# Altium PCB Preamp.PcbDoc
Units mil, origin at the board's own origin, x right, y up, seen from the top; angles counter-clockwise.
Board outline 1250 x 480 mil, 4 copper layers (Top Layer, Ground Plane, Power Plane, Bottom Layer), stack 25.9 mil thick; 15 components, 14 nets, 56 pads, 61 vias.
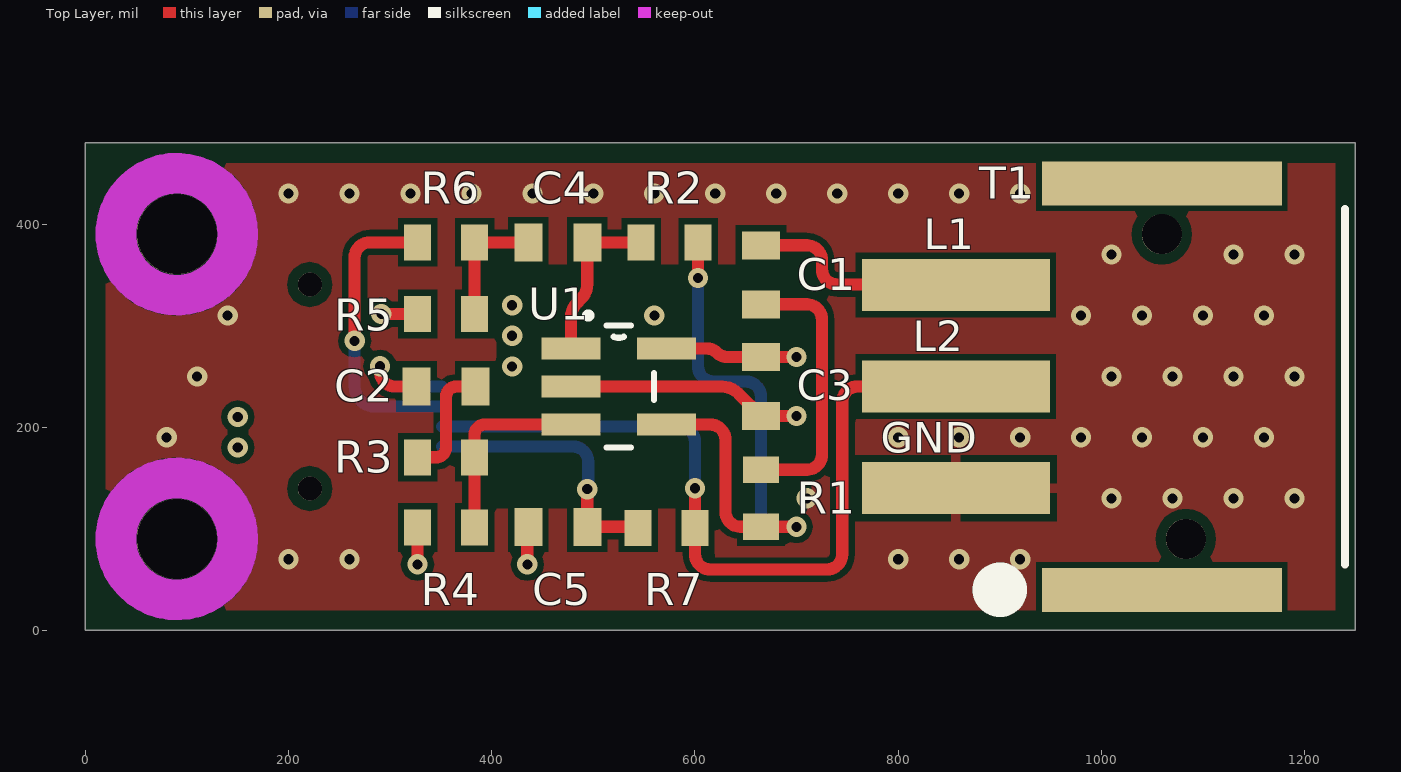
[diagram p0: Top Layer view]
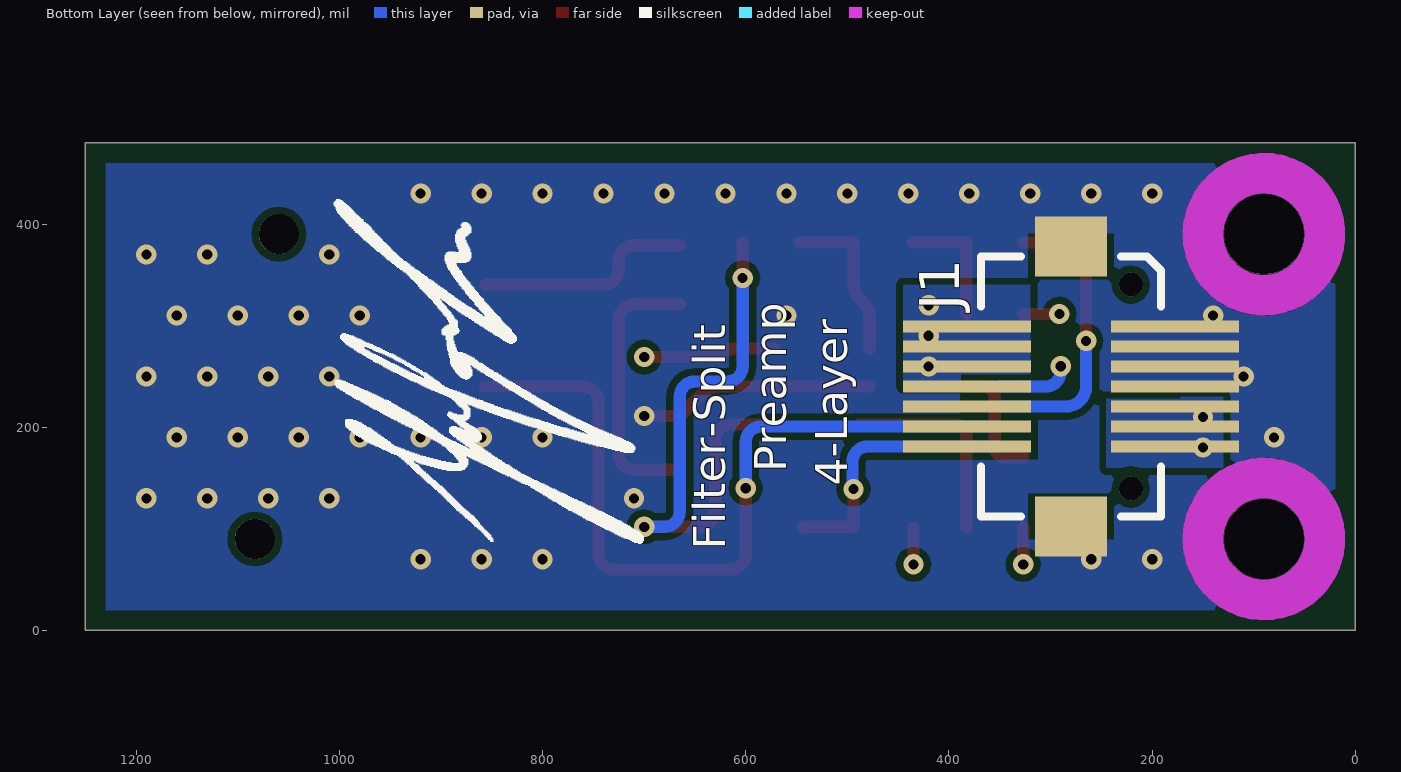
[diagram p1: Bottom Layer view, seen from below]
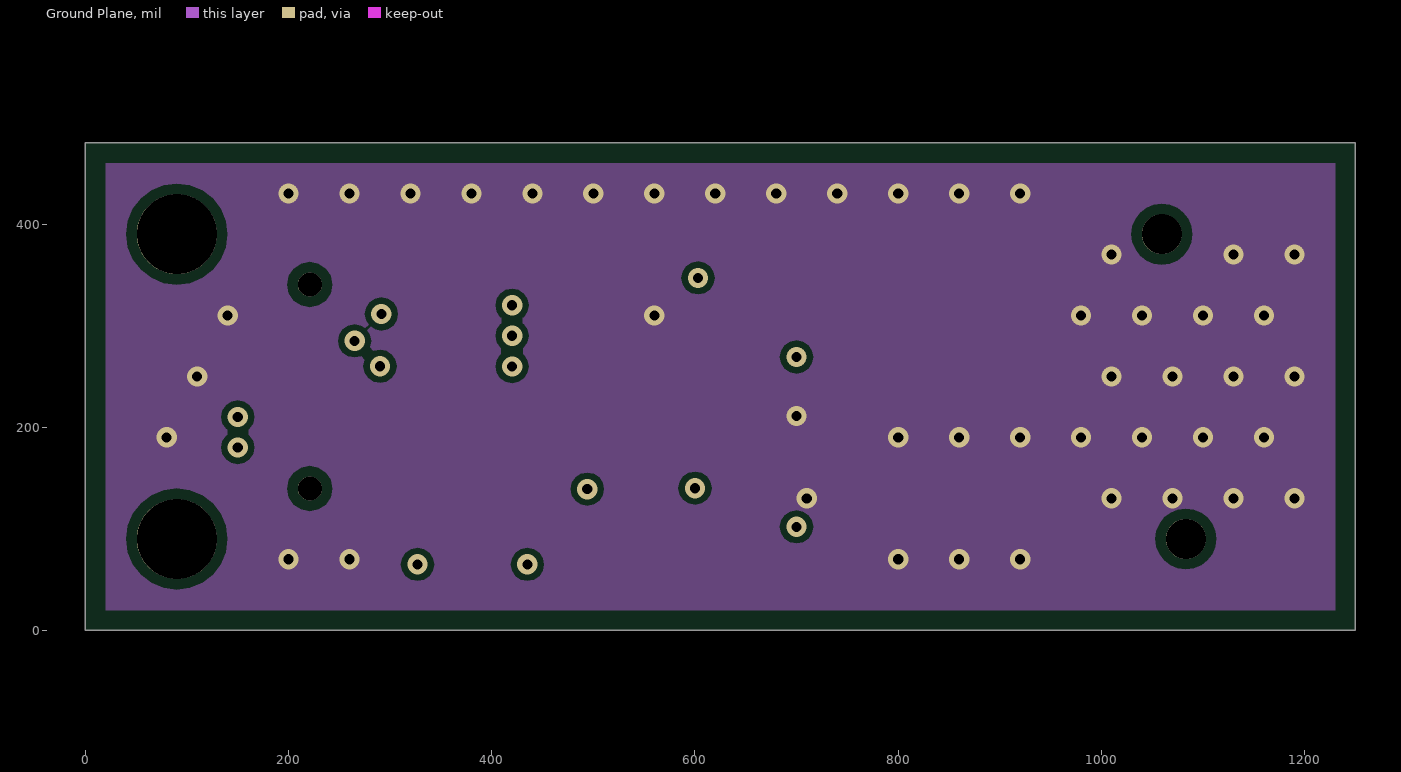
[diagram p2: Ground Plane]
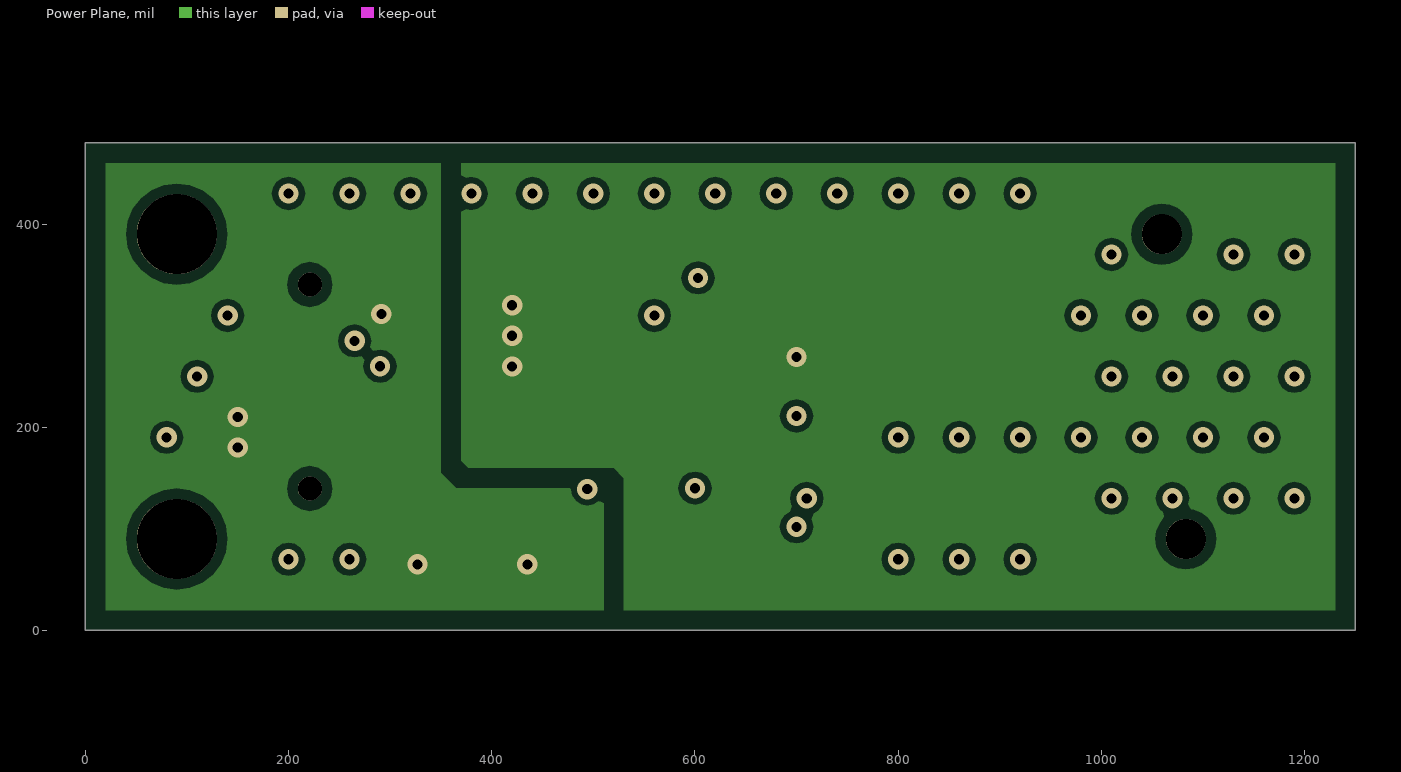
[diagram p3: Power Plane]
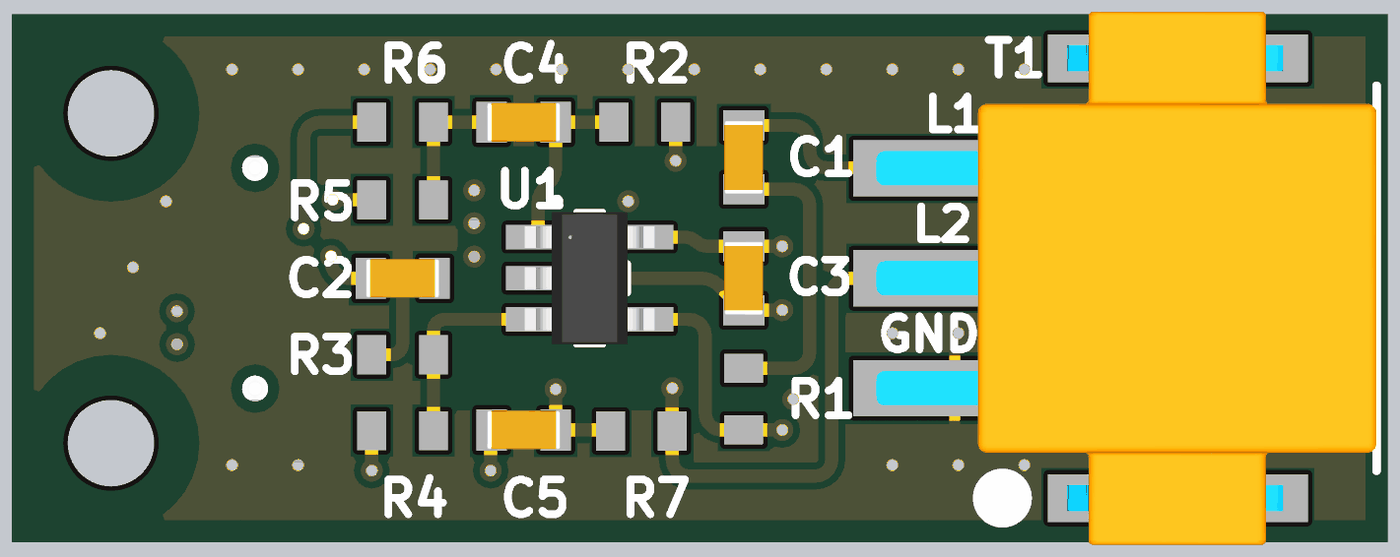
[diagram p4: 3D render of the assembled board from above, using the file's embedded part models]

## Layer stack, top to bottom
Top Solder: solder mask 1, Solder Resist, Dk 3.5
Top Layer: signal copper 1.4
Dielectric 1: core 6.7, FR-4, Dk 4.2
Ground Plane: signal copper 0.7
Dielectric 3: prepreg 5, Dk 4.2
Power Plane: signal copper 0.7
Dielectric 2: core 10, Dk 4.2
Bottom Layer: signal copper 1.4
Bottom Solder: solder mask 1, Solder Resist, Dk 3.5

## Board outline
0,0 1250,0 1250,480 0,480

## Design rules (kind name [scope] priority, off if disabled: settings)
Clearance Clearance_4 [(ObjectKind = 'Arc') And (Keepout = 'True')] p1: gap=6 ignorepadtopadclearanceinfootprint=FALSE except(0: Arc-Arc Arc-Track Arc-SMDPad Arc-THPad Arc-Via Arc-Fill Arc-Poly Arc-Region Arc-Text Arc-Hole Track-Hole SMDPad-Hole THPad-Hole Via-Hole Fill-Hole Poly-Hole Region-Hole Text-Hole; 5: SMDPad-SMDPad; 7: THPad-Via Via-Via; 10: SMDPad-Text THPad-THPad THPad-Fill THPad-Poly THPad-Region THPad-Text Via-Text Fill-Text Poly-Text Region-Text Text-Text)
Clearance Clearance_3 [InNamedPolygon('BOTTOM_GND')] p2: gap=7 ignorepadtopadclearanceinfootprint=FALSE except(0: Arc-Hole Track-Hole SMDPad-Hole THPad-Hole Via-Hole Fill-Hole Poly-Hole Region-Hole Text-Hole)
Clearance Clearance_2 [InNamedPolygon('BOTTOM_V+')] p3: gap=7 ignorepadtopadclearanceinfootprint=FALSE except(0: Arc-Hole Track-Hole SMDPad-Hole THPad-Hole Via-Hole Fill-Hole Poly-Hole Region-Hole Text-Hole)
Clearance Clearance_1 [InNamedPolygon('TOP_VREF')] p4: gap=10 ignorepadtopadclearanceinfootprint=FALSE except(0: Arc-Hole Track-Hole SMDPad-Hole THPad-Hole Via-Hole Fill-Hole Poly-Hole Region-Hole Text-Hole; 7: Arc-Fill Arc-Poly Arc-Region Track-Fill Track-Poly Track-Region SMDPad-Fill SMDPad-Poly SMDPad-Region THPad-Fill THPad-Poly THPad-Region Via-Fill Via-Poly Via-Region Fill-Fill Fill-Poly Fill-Region Poly-Poly Poly-Region Region-Region)
Clearance [All] p5: gap=6 ignorepadtopadclearanceinfootprint=FALSE except(0: Arc-Hole Track-Hole SMDPad-Hole THPad-Hole Via-Hole Fill-Hole Poly-Hole Region-Hole Text-Hole; 5: SMDPad-SMDPad; 7: THPad-Via Via-Via; 10: SMDPad-Text THPad-THPad THPad-Fill THPad-Poly THPad-Region THPad-Text Via-Text Fill-Text Poly-Text Region-Text Text-Text)
PlaneClearance [All] p1: clearance=10
PlaneConnect [All] p1: pad.planeconnectstyle=Relief pad.reliefexpansion=20 pad.reliefentries=4 pad.reliefconductorwidth=10 pad.reliefairgap=10 via.planeconnectstyle=Direct via.reliefexpansion=20 via.reliefentries=4 via.reliefconductorwidth=10 via.reliefairgap=10
PolygonConnect PolygonConnect_5 [All vs IsNamedPolygon('BOTTOM_GND')] p1: thpad.connectstyle=Relief thpad.reliefconductorwidth=10 thpad.reliefentries=4 thpad.polygonreliefangle="90 Angle" thpad.airgapwidth=10 smdpad.connectstyle=Direct smdpad.reliefconductorwidth=10 smdpad.reliefentries=4 smdpad.polygonreliefangle="90 Angle" smdpad.airgapwidth=10 via.connectstyle=Direct via.reliefconductorwidth=10 via.reliefentries=4 via.polygonreliefangle="90 Angle" via.airgapwidth=10
PolygonConnect PolygonConnect_4 [All vs IsNamedPolygon('BOTTOM_GND')] p2: thpad.connectstyle=Relief thpad.reliefconductorwidth=10 thpad.reliefentries=4 thpad.polygonreliefangle="90 Angle" thpad.airgapwidth=10 smdpad.connectstyle=Relief smdpad.reliefconductorwidth=10 smdpad.reliefentries=4 smdpad.polygonreliefangle="90 Angle" smdpad.airgapwidth=7 via.connectstyle=Direct via.reliefconductorwidth=10 via.reliefentries=4 via.polygonreliefangle="90 Angle" via.airgapwidth=10
PolygonConnect PolygonConnect_3 [All vs IsNamedPolygon('TOP_GND')] p3: thpad.connectstyle=Relief thpad.reliefconductorwidth=10 thpad.reliefentries=4 thpad.polygonreliefangle="90 Angle" thpad.airgapwidth=10 smdpad.connectstyle=Relief smdpad.reliefconductorwidth=10 smdpad.reliefentries=4 smdpad.polygonreliefangle="90 Angle" smdpad.airgapwidth=7 via.connectstyle=Direct via.reliefconductorwidth=10 via.reliefentries=4 via.polygonreliefangle="90 Angle" via.airgapwidth=10
PolygonConnect PolygonConnect_2 [All vs IsNamedPolygon('TOP_VREF')] p4: thpad.connectstyle=Relief thpad.reliefconductorwidth=10 thpad.reliefentries=4 thpad.polygonreliefangle="90 Angle" thpad.airgapwidth=10 smdpad.connectstyle=Relief smdpad.reliefconductorwidth=10 smdpad.reliefentries=4 smdpad.polygonreliefangle="90 Angle" smdpad.airgapwidth=7 via.connectstyle=Direct via.reliefconductorwidth=10 via.reliefentries=4 via.polygonreliefangle="90 Angle" via.airgapwidth=10
PolygonConnect PolygonConnect_1 [All vs IsNamedPolygon('BOTTOM_VREF')] p5: thpad.connectstyle=Relief thpad.reliefconductorwidth=10 thpad.reliefentries=4 thpad.polygonreliefangle="90 Angle" thpad.airgapwidth=10 smdpad.connectstyle=Direct smdpad.reliefconductorwidth=10 smdpad.reliefentries=4 smdpad.polygonreliefangle="90 Angle" smdpad.airgapwidth=10 via.connectstyle=Direct via.reliefconductorwidth=10 via.reliefentries=4 via.polygonreliefangle="90 Angle" via.airgapwidth=10
PolygonConnect [All] p6: connectstyle=Direct reliefconductorwidth=20 reliefentries=4 polygonreliefangle="90 Angle" airgapwidth=10
RoutingVias [All] p1: holewidth=10 width=20 viastyle="Through Hole" minholewidth=10 minwidth=20 maxholewidth=28 maxwidth=50
SolderMaskExpansion [All] p1: expansion=4
Width [All] p1: maxlimit=50 minlimit=7 preferedwidth=20 toplayer_prefwidth=10 midlayer1_minwidth=10 midlayer2_minwidth=10 bottomlayer_prefwidth=10 minimp=50.000000 maximp=50.000000 favimp=50.000000
28 further rules are at their usual default settings.

## Components (designator, comment, footprint, x,y, rotation, side; value= is the part's Value field where it differs from the comment)
C1 "2200pF" CAPC1608X09N 665,350 r270 top
C2 "2200pF" CAPC1608X09N 355,240 r0 top
C3 "10nF" CAPC1608X09N 665,240 r90 top
C4 "1uF" CAPC1608X09N 465,381.95 r180 top
C5 "0.018uF" CAPC1608X09N 465,101.95 r0 top
J1 "CONN RECEPT 14POS" DF12(3.0)-14DS 280,240 r270 bottom
R1 "30K" RESC1608X06N 665,130 r270 top
R2 "150K" RESC1608X06N 575,381.95 r180 top
R3 "30K" RESC1608X06N 355,170.39 r0 top
R4 "150K" RESC1608X06N 355,101.36 r180 top
R5 "47K" RESC1608X06N 355,311.36 r0 top
R6 "10K" RESC1608X06N 355,381.95 r0 top value=10k
R7 "20K" RESC1608X06N 572,100.98 r180 top
T1 "TERM BLK HOR 3POS" "TERM BLK HOR 3POS" 1030,240 r270 top
U1 "OPA191" SOT23-5 525,240 r0 top

## Footprints (in the part's own frame and the unit in brackets; to place one, negate y for a bottom-side part, rotate by r counter-clockwise, add the part's x,y. Pads: shape width x height; smd on the part's side, far side on the other; paste and mask are expansions set on the pad)
CAPC1608X09N [mm] "Chip Capacitor, 2-Leads, Body 1.60x0.80mm, IPC Medium Density"
  rect 0.7x0.95 smd: 1(-0.737,0) 2(0.738,0)
  body extent -0.85,-0.45 0.85,0.45, height 0.8
DF12(3.0)-14DS [mm] "CONN RECEPT 14POS 3MM SMD 0.5MM"
  rect 0.3x3.2 smd mask+0.051: 1(-1.5,2.6) 2(-1,2.6) 3(-0.5,2.6) 4(0,2.6) 5(0.5,2.6) 6(1,2.6) 7(1.5,2.6) 8(1.5,-2.6) 9(1,-2.6) 10(0.5,-2.6) 11(0,-2.6) 12(-0.5,-2.6) 13(-1,-2.6) 14(-1.5,-2.6)
  rect 1.5x1.8 smd mask+0.102: ""(-3.5,0)
  round 0.6 hole 0.6 unplated mask+0: ""(-2.55,1.5) ""(2.55,1.5)
  rect 1.5x1.8 smd: ""(3.5,0)
  Multi-Layer region: -4,1
  silkscreen extent -3.25,-2.25 3.25,2.25, body extent -3.3,-2.3 3.3,2.3, height 2.19
RESC1608X06N [mm] "Chip Resistor, 2-Leads, Body 1.60x0.80mm, IPC Medium Density"
  rect 0.67x0.9 smd: 1(-0.713,0) 2(0.713,0)
  body extent -0.85,-0.45 0.85,0.45, height 0.55
SOT23-5 [mil]
  rect 58x22 smd: 1(-47,37.4) 2(-47,0) 3(-47,-37.4) 4(47,-37.4) 5(47,37.4)
  silkscreen extent -31,-60 34,71, body extent -59,-60 59,60, height 57
"TERM BLK HOR 3POS" [mm] "3 Position Wire to Board Terminal Block Horizontal with Board 0.100\" (2.54mm) Surface Mount"
  rect 1.3x4.7 smd: 1(2.54,-4.4) 2(0,-4.4) 3(-2.54,-4.4)
  rect 1.1x6 smd: ""(-5.08,0.75) ""(5.08,0.75)
  round 1 hole 1 mask+0: ""(-3.81,0.75) ""(3.81,1.35)
  silkscreen extent -4.45,-3.48 5.26,5.33, body extent -6.16,-6.22 6.16,5.33, height 4.95

## Part data
C1 C2: library part "CAP CER 2200pF 0603", Digikey Part Number=490-7768-1-ND, Manufacturer=Murata, Rating=C0G, Tolerance=1%, Voltage=50V
C3: library part "CAP CER 10nF 0603", "Bypass caps", Digikey Part Number=490-9666-1-ND, Manufacturer=Murata
C4: library part "CAP CER 1UF 25V X7R 0603", "1µF ±10% 25V Ceramic Capacitor X7R 0603 (1608 Metric)", Digikey Part Number=490-10673-1-ND, Package=0603, Rating=X7R, Tolerance=10%, Voltage=25V
C5: library part "CAP CER 0.018UF 35V NP0 0603", "CAP CER 0.018UF 35V NP0 0603", Digikey Part Number=445-174558-1-ND, Package=0603, Rating=NP0, Tolerance=5%, Voltage=35V
J1: library part DF12(3.0)-14DS-0.5V(86), "14 Position Connector Receptacle, Center Strip Contacts Surface Mount Gold", Digikey Part Number=H11702CT-ND, Manufacturer=Hirose
R1 R3: library part "RES SMD 30K OHM 1% 1/10W 0603", "RES SMD 30K OHM 1% 1/10W 0603", Digikey Part Number=311-30.0KHRCT-ND, Tolerance=1%, Type=RES
R2 R4: library part "RES SMD 150K 1% 1/10W 0603", "RES SMD 150K 1% 1/10W 0603", Digikey Part Number=311-150KHRCT-ND, Tolerance=1%, Type=RES
R5: library part "RES SMD 47K OHM 1% 1/10W 0603", "RES 47K 0603", Digikey Part Number=311-47.0KHRCT-ND, Tolerance=1%, Type=RES
R6: library part "RES SMD 10K OHM 1% 1/10W 0603", "RES SMD 10K OHM 1% 1/10W 0603", Digikey Part Number=311-10.0KHRCT-ND, Manufacturer=Yageo, Manufacturer Part Number=RC0603FR-0710KL, Power=0.1W, Temperature=155dC, Tolerance=1%, Type=RES
R7: library part "RES SMD 20K OHM 1% 1/10W 0603", "RES SMD 20K OHM 1% 1/10W 0603", Digikey Part Number=311-20.0KHRCT-ND, Tolerance=1%, Type=RES
T1: "3 Position Wire to Board Terminal Block Horizontal with Board 0.100\" (2.54mm) Surface Mount", Digikey Part Number=1195-3657-1-ND
U1: library part OPA191_SOT23

## Free pads (board coordinates)
  round 78.74 hole 78.74 unplated: ""(90,90) ""(90,390)

## Via types
v1: diameter 20, hole 10, Top Layer to Bottom Layer, tented both sides, 61 vias

## Nets (pads, with @x,y where several pads share a name; then routed paths per layer and width w, separated by ;. In a path a pad name is that pad's centre, name@x,y a point inside that pad or via, vN(x,y) a via of type N, cw(c..) or ccw(c..) an arc to the next point about the centre after c; other vN are vias at no path point)
GND: C3.1 J1.1 J1.2 J1.3 J1.4 T1.1 U1.2 | length 233
  Top Layer w12: U1.2 626.44,240 cw(c626.44,217) 642.7,233.26 C3.1 v1(700,210.97)
  other v1: 200,70 260,70 800,70 860,70 920,70 710,130 1010,130 1070,130 1130,130 1190,130 80,190 800,190 860,190 920,190 980,190 1040,190 1100,190 1160,190 110,250 1010,250 1070,250 1130,250 1190,250 140,310 560,310 980,310 1040,310 1100,310 1160,310 1010,370 1130,370 1190,370 200,430 260,430 320,430 380,430 440,430 500,430 560,430 620,430 680,430 740,430 800,430 860,430 920,430
NetC1_1: C1.1 T1.3 | length 217.7
  Top Layer w12: C1.1 710,379.04 cw(c710,364.04) 725,364.04 725,355.46 ccw(c740,355.46) 740,340.46 856.31,340.46 T1.3
NetC1_2: C1.2 R1.1 | length 270
  Top Layer w12: R1.1 710,158.05 ccw(c710,173.05) 725,173.05 725,305.96 ccw(c710,305.96) 710,320.96 C1.2
NetC2_2: C2.2 R3.1 | length 118.1
  Top Layer w12: R3.1 345,170.39 ccw(c345,180.39) 355,180.39 355,230 cw(c365,230) 365,240 C2.2
NetC4_1: C4.1 R2.2 U1.1 | length 162.4
  Top Layer w12: U1.1 478,308.07 cw(c498,308.07) 483.86,322.22 488.18,326.54 ccw(c474.04,340.68) 494.04,340.68 C4.1 R2.2
NetC4_2: C4.2 R5.2 R6.2 | length 123.5
  Top Layer w12: R5.2 R6.2 C4.2
NetR1_2: R1.2 R2.1 U1.4 | length 563.4
  Top Layer w12: U1.4@582,202.6 615,202.6 cw(c615,187.6) 630,187.6 630,116.95 ccw(c645,116.95) 645,101.95 R1.2 v1(700,101.95) ; v1(603.05,346.95) R2.1
  Bottom Layer w12: v1(603.05,346.95) 603.05,260 ccw(c618.05,260) 618.05,245 650,245 cw(c650,230) 665,230 665,116.95 ccw(c680,116.95) 680,101.95 v1(700,101.95)
NetR3_2: R3.2 R4.1 U1.3 | length 201.9
  Top Layer w12: R4.1 R3.2 383.05,192.6 cw(c393.05,192.6) 393.05,202.6 U1.3@488,202.6
OUT: J1.10 R6.1 | length 294.4
  Top Layer w12: v1(265,285) 265,366.95 cw(c280,366.95) 280,381.95 R6.1
  Bottom Layer w12: v1(265,285) 265,240.31 ccw(c285,240.31) 285,220.31 J1.10@350.87,220.31
SW_IN_1: J1.9 R7.1 T1.2 | length 800.8
  Top Layer w12: v1(600.05,140) R7.1 600.05,75 ccw(c615.05,75) 615.05,60 730,60 ccw(c730,75) 745,75 745,225 cw(c760,225) 760,240 T1.2
  Bottom Layer w12: J1.9@350.87,200.63 585.05,200.63 cw(c585.05,185.63) 600.05,185.63 v1(600.05,140)
SW_IN_2: C5.2 J1.8 R7.2 | length 267.6
  Top Layer w12: v1(494.04,139.04) C5.2 542.98,101.95 R7.2
  Bottom Layer w12: J1.8@350.87,180.94 480,180.94 cw(c480,165.94) 495,165.94 495,140 ccw(c495,139.04) v1(494.04,139.04)
SW_OUT: C2.1 J1.11 | length 124
  Top Layer w12: v1(290,260) 290,255 ccw(c305,255) 305,240 C2.1
  Bottom Layer w12: v1(290,260) 290,255 ccw(c305,255) 305,240 J1.11@350.87,240
V+: C3.2 J1.12 J1.13 J1.14 U1.5 | length 130.2
  Top Layer w12: U1.5 611.98,277.4 cw(c611.98,263.84) 621.57,273.43 ccw(c632.18,284.04) 632.18,269.04 C3.2 v1(700,269.04)
  other v1: 420,259.68 420,290 420,320
VREF: C5.1 J1.5 J1.6 J1.7 R4.2 R5.1 | length 111.6
  Top Layer w10: C5.1@435,100.98 cw(c435.96,100.98) C5.1
  Top Layer w12: v1(291.36,311.36) R5.1 ; v1(326.95,65) R4.2 ; v1(435,65) C5.1@435,100.98
  Bottom Layer w12: v1@290,310 cw(c291.36,310) v1(291.36,311.36)
  other v1: 150,180 150,210
pads on no net: J1. T1.

## Polygon pours and split planes (outlines as drawn)
GND on Bottom Layer "BOTTOM_GND" (solid, remove dead copper, pour order 26): 20,460 1230,460 1230,20 20,20
V+ on Bottom Layer "V+_BOT" (solid, pour order 24): 445,340 445,240 320,240 320,340
VREF on Bottom Layer "BOTTOM_VREF" (solid, pour order 18): 130,230 245,230 245,160 130,160
V+ on Power Plane "POWER_PLANE" (solid, pour order 34): 370,460 370,166.84 376.84,160 520,160 530,150 530,20 1230,20 1230,460
VREF on Power Plane "VREF_PLANE" (solid, pour order 32): 20,460 350,460 350,155 365,140 510,140 510,20 20,20
GND on Top Layer "TOP_GND" (solid, remove dead copper, pour order 28): 20,460 1230,460 1230,20 20,20
GND on Ground Plane "GND_PLANE" (solid, pour order 30): 20,460 1230,460 1230,20 20,20

## Keep-outs
Top Layer:
  circle w40: c90,390 r60
  circle w40: c90,90 r60
Bottom Layer:
  circle w40: c90,390 r60
  circle w40: c90,90 r60

## Other copper
Top Layer:
  pour cut-out: 405,360 715,360 715,120 405,120

## Silkscreen, mask and mechanical layers (free items; w line width, h text height)
Top Overlay:
  text "L1" at 825,375 h30
  text "L2" at 814.5,275 h30
  text "GND" at 783.02,175 h30
Bottom Overlay:
  region: 4245 vertices and 4 holes, not listed, extent 700.3,85.3 1005.66,424.29
  text "Preamp" at 560,155.68 h31.5 r270
  text "4-Layer" at 500,142.56 h31.5 r270
  text "Filter-Split" at 620,79.59 h31.5 r270
Outline:
  the board outline again, w10
Mechanical 13:
  circle w10: c90,390 r51.38
  circle w10: c90,90 r51.38
  circle w2: c90,90 r80
  circle w2: c90,390 r80
  lines w20: 520,0 520,150 ; 360,150 520,150 ; 360,150 360,480 360,150 ; 360,150 520,150